# EAGLE board BB-v0.0.1-march-2011 (EAGLE 5.11)
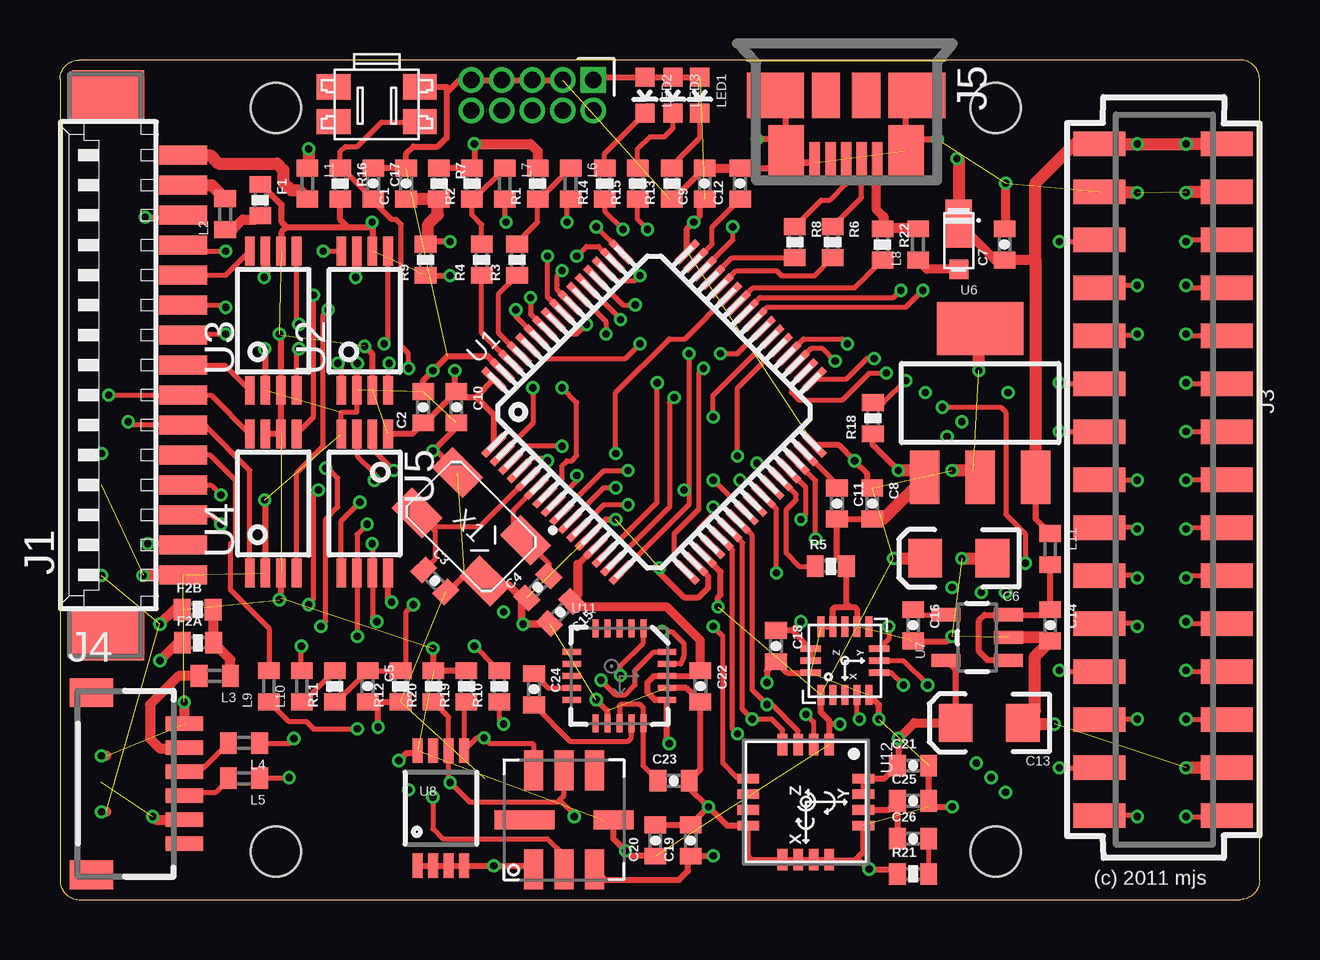
[diagram p0: board, top side]
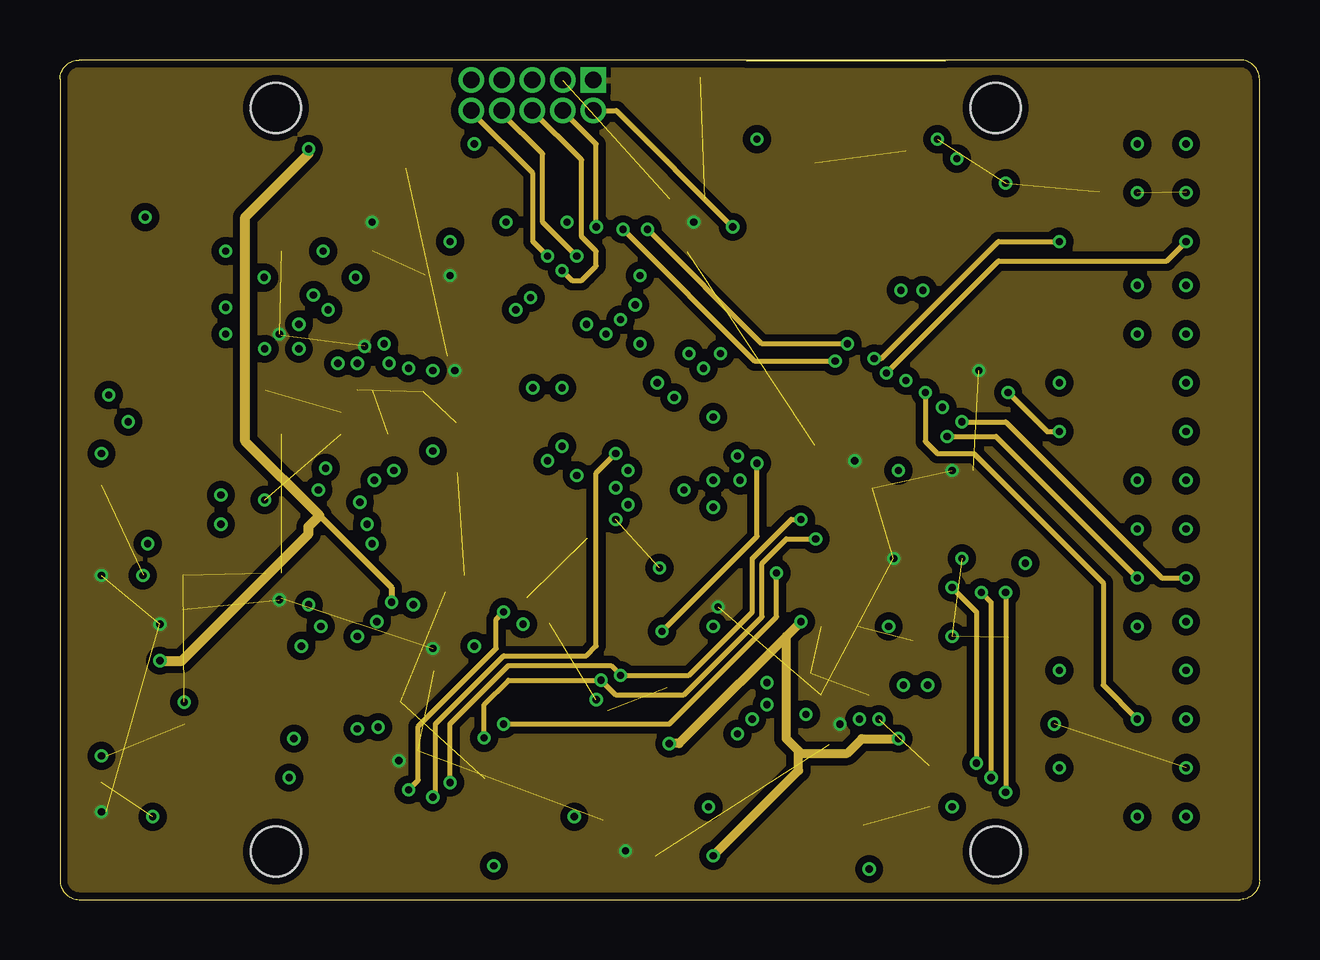
[diagram p1: board, inner layer Route2]
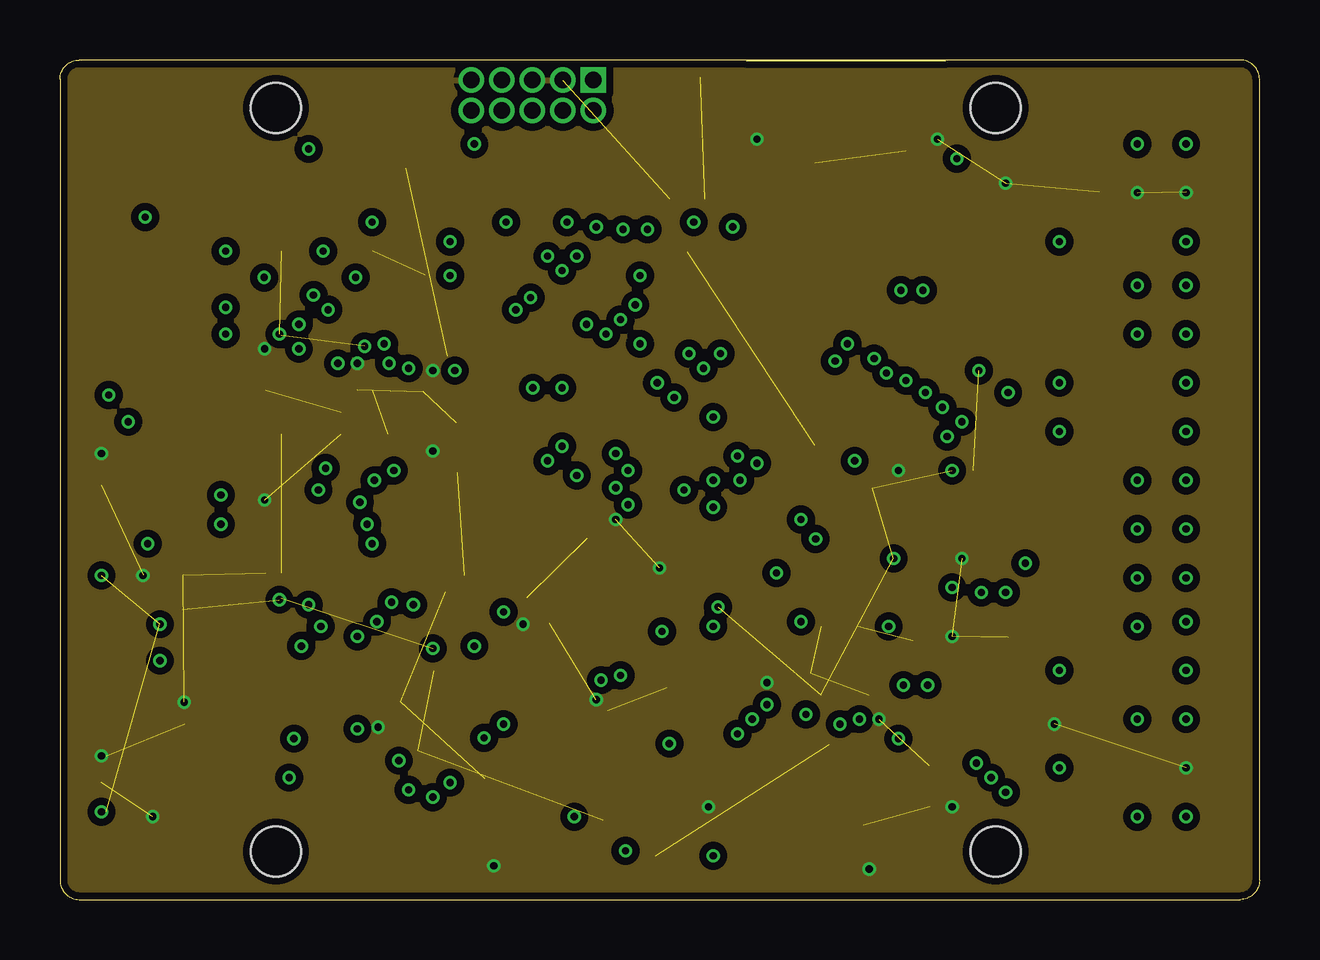
[diagram p2: board, inner layer Route15]
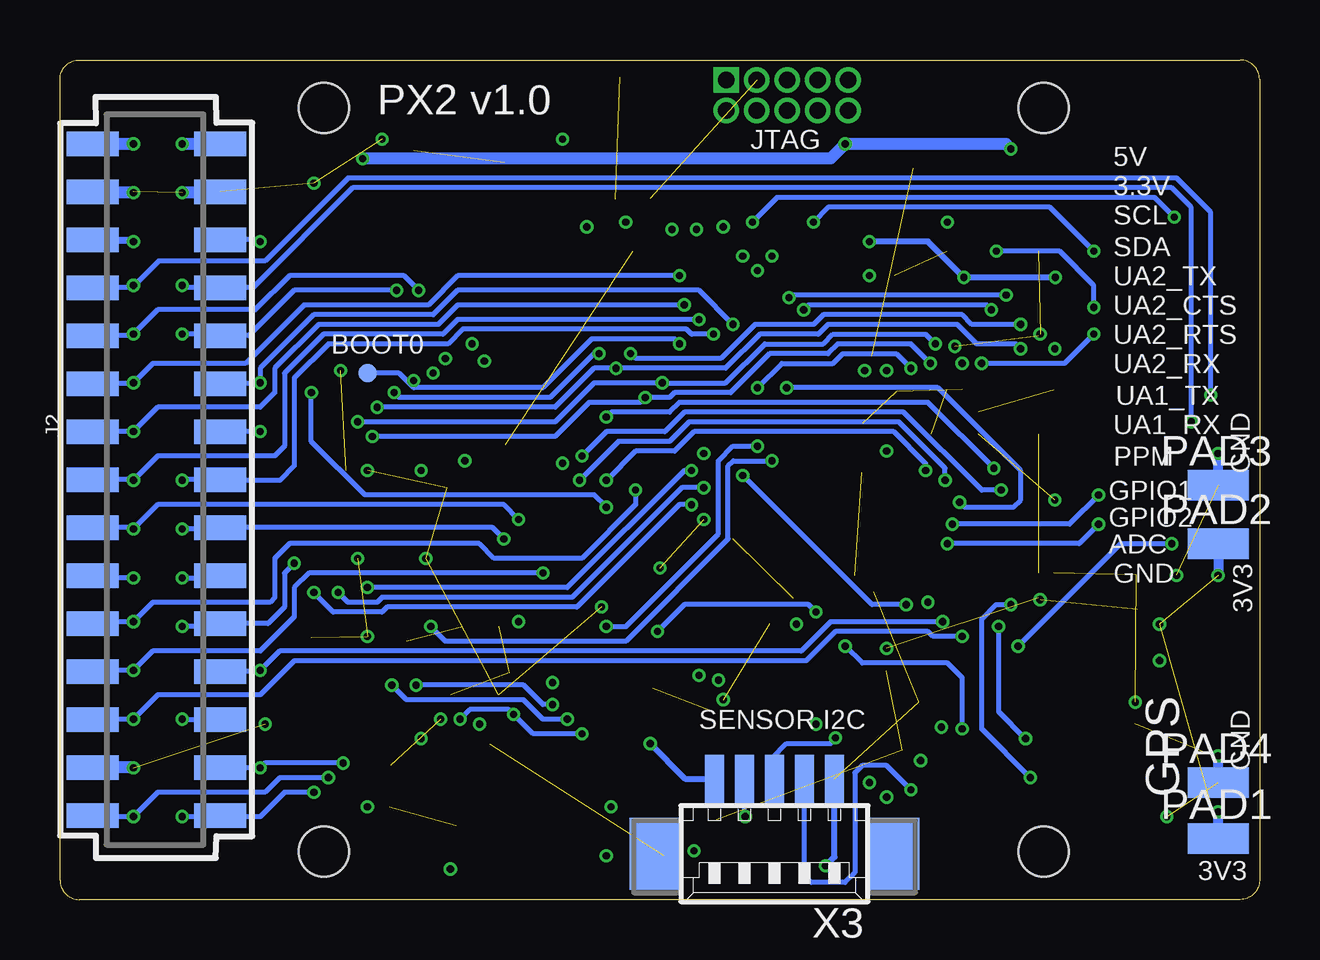
[diagram p3: board, bottom side, seen from below]

Size 50 x 35 mm. Coordinates in mm from the lower left corner, seen from the top.
Outline: 0,0.8 arc90 0.8,0 49.2,0 arc90 50,0.8 50,34.2 arc90 49.2,35 0.8,35 arc90 0,34.2 0,0.8
Copper layers (1*2*15*16): Top 0.035mm / dielectric 0.5mm / Route2 0.035mm / dielectric 0.5mm / Route15 0.035mm / dielectric 0.5mm / Bottom 0.035mm
Design rules "pixhawk2 *": minimum track width 0.15mm, minimum drill 0.2mm, track to track 0.15mm, track to pad 0.15mm, pad to pad 0.15mm, via to via 0.15mm, smd to smd 0.15mm, copper to edge 0.2mm, drill to drill 0.2mm, minimum pad ring 0.125mm, minimum via ring 0.125mm, stop-mask expansion 3mil, vias tented up to drill 0.3mm, thermal gap 8mil
Net classes: 0 signal: width 0.203 mm, drill 0.3 mm, clearance 0.203 mm; 1 power: width 0.254 mm, drill 0.3 mm, clearance 0.203 mm

## Footprints (pad centres in the part's own frame; a part is rotated, then mirrored left to right if it is on the bottom)
0402-CAP = smd 0.7 x 0.9: 1 -0.65,0; 2 0.65,0
EIA3216 = smd 1.4 x 1.6: A 1.4,0; C -1.4,0
MICROSMP = smd 0.8 x 0.8: ANODE 0.65,0 | smd 2 x 1.1: CATHODE -1.25,0
0402-PTC = smd 0.7 x 0.9: 1 -0.65,0; 2 0.65,0
53261-15 = smd 0.8 x 2: 1 8.75,-2.5; 2 7.5,-2.5; 3 6.25,-2.5; 4 5,-2.5; 5 3.75,-2.5; 6 2.5,-2.5; 7 1.25,-2.5; 8 0,-2.5; 9 -1.25,-2.5; 10 -2.5,-2.5; 11 -3.75,-2.5; 12 -5,-2.5; 13 -6.25,-2.5; 14 -7.5,-2.5; 15 -8.75,-2.5 | smd 2.1 x 3: S1 11.25,0.625; S2 -11.25,0.625
HEADER_2MM_2X15_REVERSE = smd 1.02 x 2.16: 1 -14,-2.655; 2 -14,2.655; 3 -12,-2.655; 4 -12,2.655; 5 -10,-2.655; 6 -10,2.655; 7 -8,-2.655; 8 -8,2.655; 9 -6,-2.655; 10 -6,2.655; 11 -4,-2.655; 12 -4,2.655; 13 -2,-2.655; 14 -2,2.655; 15 0,-2.655; 16 0,2.655; 17 2,-2.655; 18 2,2.655; 19 4,-2.655; 20 4,2.655; 21 6,-2.655; 22 6,2.655; 23 8,-2.655; 24 8,2.655; 25 10,-2.655; 26 10,2.655; 27 12,-2.655; 28 12,2.655; 29 14,-2.655; 30 14,2.655
HEADER_2MM_2X15 = smd 1.02 x 2.16: 1 14,-2.655; 2 14,2.655; 3 12,-2.655; 4 12,2.655; 5 10,-2.655; 6 10,2.655; 7 8,-2.655; 8 8,2.655; 9 6,-2.655; 10 6,2.655; 11 4,-2.655; 12 4,2.655; 13 2,-2.655; 14 2,2.655; 15 0,-2.655; 16 0,2.655; 17 -2,-2.655; 18 -2,2.655; 19 -4,-2.655; 20 -4,2.655; 21 -6,-2.655; 22 -6,2.655; 23 -8,-2.655; 24 -8,2.655; 25 -10,-2.655; 26 -10,2.655; 27 -12,-2.655; 28 -12,2.655; 29 -14,-2.655; 30 -14,2.655
SM06B-SRSS-TB = smd 0.6 x 1.55: 1 -2.5,2.975; 2 -1.5,2.975; 3 -0.5,2.975; 4 0.5,2.975; 5 1.5,2.975; 6 2.5,2.975 | smd 1.2 x 1.8: FIT@1 -3.8,-0.9; FIT@2 3.8,-0.9
MOLEX-47346-0001 = smd 1.7 x 0.44: 1 2.8,1.3; 2 2.8,0.65; 3 2.8,0; 4 2.8,-0.65; 5 2.8,-1.3 | smd 1.9 x 2.375: GND1 0,2.95; GND4 0,-2.95 | smd 2.1 x 1.475: GND2 2.3,2.5; GND3 2.3,-2.5 | smd 1.9 x 1.175: GND5 0,-0.838; GND6 0,0.838
FTSH-105-01-XXX-DV = drill 0.7 pad 1.067 square: 1 0,0 | drill 0.7 pad 1.067 round: 2 0,1.27; 3 1.27,0; 4 1.27,1.27; 5 2.54,0; 6 2.54,1.27; 7 3.81,0; 8 3.81,1.27; 9 5.08,0; 10 5.08,1.27
C0402 = smd 0.7 x 0.9: 1 -0.65,0; 2 0.65,0
LED-0603 = smd 0.8 x 0.8: A 0,-0.75; C 0,0.75
SMD1,27-2,54 = smd 1.27 x 2.54: 1 0,0
0402-RES = smd 0.7 x 0.9: 1 -0.65,0; 2 0.65,0
EVQP7J01K = smd 1.4 x 1.05: A1 -1.8,0.725; A2 1.8,0.725; B3 -1.8,-0.725; B4 1.8,-0.725
PAD.03X.03 = smd 0.762 x 0.762: P$1 0,0
TQFP64 = smd 1.2 x 0.29: 1 -5.7,3.75; 2 -5.7,3.25; 3 -5.7,2.75; 4 -5.7,2.25; 5 -5.7,1.75; 6 -5.7,1.25; 7 -5.7,0.75; 8 -5.7,0.25; 9 -5.7,-0.25; 10 -5.7,-0.75; 11 -5.7,-1.25; 12 -5.7,-1.75; 13 -5.7,-2.25; 14 -5.7,-2.75; 15 -5.7,-3.25; 16 -5.7,-3.75; 33 5.7,-3.75; 34 5.7,-3.25; 35 5.7,-2.75; 36 5.7,-2.25; 37 5.7,-1.75; 38 5.7,-1.25; 39 5.7,-0.75; 40 5.7,-0.25; 41 5.7,0.25; 42 5.7,0.75; 43 5.7,1.25; 44 5.7,1.75; 45 5.7,2.25; 46 5.7,2.75; 47 5.7,3.25; 48 5.7,3.75 | smd 0.29 x 1.2: 17 -3.75,-5.7; 18 -3.25,-5.7; 19 -2.75,-5.7; 20 -2.25,-5.7; 21 -1.75,-5.7; 22 -1.25,-5.7; 23 -0.75,-5.7; 24 -0.25,-5.7; 25 0.25,-5.7; 26 0.75,-5.7; 27 1.25,-5.7; 28 1.75,-5.7; 29 2.25,-5.7; 30 2.75,-5.7; 31 3.25,-5.7; 32 3.75,-5.7; 49 3.75,5.7; 50 3.25,5.7; 51 2.75,5.7; 52 2.25,5.7; 53 1.75,5.7; 54 1.25,5.7; 55 0.75,5.7; 56 0.25,5.7; 57 -0.25,5.7; 58 -0.75,5.7; 59 -1.25,5.7; 60 -1.75,5.7; 61 -2.25,5.7; 62 -2.75,5.7; 63 -3.25,5.7; 64 -3.75,5.7
R-PDSO-G08 = smd 0.4 x 1.2: 1 -0.975,-2.9; 2 -0.325,-2.9; 3 0.325,-2.9; 4 0.975,-2.9; 5 0.975,2.9; 6 0.325,2.9; 7 -0.325,2.9; 8 -0.975,2.9
SOT-223 = smd 1.219 x 2.235: 1 -2.311,-3.099; 2 0,-3.099; 3 2.311,-3.099 | smd 3.6 x 2.2: 4 0,3.099
SOT23-5 = smd 0.55 x 1.2: 1 -0.95,-1.3; 2 0,-1.3; 3 0.95,-1.3; 4 0.95,1.3; 5 -0.95,1.3
MSOP-8 = smd 0.41 x 1.02: 1 -0.975,-2.4; 2 -0.325,-2.4; 3 0.325,-2.4; 4 0.975,-2.4; 5 0.975,2.4; 6 0.325,2.4; 7 -0.325,2.4; 8 -0.975,2.4
LIS331DLH-MAN = smd 0.85 x 0.285: 1 -1.425,1; 2 -1.425,0.5; 3 -1.425,0; 4 -1.425,-0.5; 5 -1.425,-1; 9 1.425,-1; 10 1.425,-0.5; 11 1.425,0; 12 1.425,0.5; 13 1.425,1 | smd 0.285 x 0.85: 6 -0.5,-1.425; 7 0,-1.425; 8 0.5,-1.425; 14 0.5,1.425; 15 0,1.425; 16 -0.5,1.425
BMP085 = smd 1.67 x 0.8: 1 -2.065,1.27; 2 -2.065,0; 3 -2.065,-1.27; 5 2.065,-1.27; 6 2.065,0; 7 2.065,1.27 | smd 0.8 x 1.67: 4 0,-2.065 | smd 0.8 x 2.5: 8 0,1.65
LPCC20 = smd 0.25 x 0.76: 1 1,1.98; 2 0.5,1.98; 3 0,1.98; 4 -0.5,1.98; 5 -1,1.98; 11 -1,-1.98; 12 -0.5,-1.98; 13 0,-1.98; 14 0.5,-1.98; 15 1,-1.98 | smd 0.76 x 0.25: 6 -1.98,1; 7 -1.98,0.5; 8 -1.98,0; 9 -1.98,-0.5; 10 -1.98,-1; 16 1.98,-1; 17 1.98,-0.5; 18 1.98,0; 19 1.98,0.5; 20 1.98,1
L3G4200DH-MAN = smd 0.9 x 0.4: 1 -2.4,0.975; 2 -2.4,0.325; 3 -2.4,-0.325; 4 -2.4,-0.975; 9 2.4,-0.975; 10 2.4,-0.325; 11 2.4,0.325; 12 2.4,0.975 | smd 0.4 x 0.9: 5 -0.975,-2.4; 6 -0.325,-2.4; 7 0.325,-2.4; 8 0.975,-2.4; 13 0.975,2.4; 14 0.325,2.4; 15 -0.325,2.4; 16 -0.975,2.4
MOUNT-HOLE2.1 = hole 2.1: 0,0
OSCILLATOR-5.0X3.2 = smd 1.8 x 1.2: 1 -2,-1.2; 2 2,-1.2; 3 2,1.2; 4 -2,1.2
53261-05 = smd 0.8 x 2: 1 2.5,-2.5; 2 1.25,-2.5; 3 0,-2.5; 4 -1.25,-2.5; 5 -2.5,-2.5 | smd 2.1 x 3: S1 5,0.625; S2 -5,0.625

## Placement (x,y rotation side)
C1  0u1  [0402-CAP]  14.43,29.84 90 top
C2  0u1  [0402-CAP]  15.14,20.52 90 top
C3  10p  [0402-CAP]  15.62,13.29 315 top
C4  10p  [0402-CAP]  19.92,13.03 45 top
C5  0u1  [0402-CAP]  12.83,8.89 270 top
C6  10u  [EIA3216]  37.47,14.22 180 top
C7  0u1  [0402-CAP]  39.37,27.3 90 top
C8  0u1  [0402-CAP]  33.86,16.51 270 top
C9  0u1  [0402-CAP]  26.87,29.84 90 top
C10  0u1  [0402-CAP]  16.53,20.52 270 top
C11  2u2  [0402-CAP]  32.38,16.51 270 top
C12  2u2  [0402-CAP]  28.35,29.84 90 top
C13  10u  [EIA3216]  38.73,7.37 180 top
C14  0u1  [0402-CAP]  41.27,11.43 270 top
C15  0u1  [0402-CAP]  20.86,11.97 225 top
C16  470p  [0402-CAP]  35.56,11.43 270 top
C17  0u1  [0402-CAP]  13.06,29.84 270 top
C18  0u1  [0402-CAP]  29.84,10.57 270 top
C19  0u1  [0402-CAP]  26.29,2.46 90 top
C20  0u1  [0402-CAP]  24.82,2.46 90 top
C21  0u1  [0402-CAP]  35.56,5.59 0 top
C22  0u1  [0402-CAP]  26.7,8.89 270 top
C23  4u7  [0402-CAP]  25.58,4.95 0 top
C24  0u22  [0402-CAP]  19.76,8.76 270 top
C25  0u01  [0402-CAP]  35.56,4.11 0 top
C26  0u47  [0402-CAP]  35.56,2.54 0 top
D1  MSS1P4-M3  [MICROSMP]  37.47,26.92 270 top
F1  500mA  [0402-PTC]  8.35,29.16 270 top
F2A  150mA  [0402-PTC]  5.75,10.7 0 top
F2B  150mA  [0402-PTC]  5.74,12.09 0 top
J1  53261-15  [53261-15]  2.64,22.28 90 top
J2  HEADER_2X15-REV  [HEADER_2MM_2X15_REVERSE]  45.97,17.51 270 bottom
J3  HEADER_2X15  [HEADER_2MM_2X15]  45.97,17.51 90 top
J4  SM06B-SRSS-TB  [SM06B-SRSS-TB]  2.22,4.83 270 top
J5  47346-0001  [MOLEX-47346-0001]  32.77,33.53 270 top
J6  ARM_MINI_JTAG-TH  [FTSH-105-01-XXX-DV]  22.23,34.16 180 top
L1  FERRITE  [C0402]  10.31,29.84 270 top
L2  FERRITE  [C0402]  6.88,28.57 90 top
L3  FERRITE  [C0402]  6.45,9.32 180 top
L4  FERRITE  [C0402]  7.67,6.53 180 top
L5  FERRITE  [C0402]  7.67,5.05 180 top
L6  FERRITE  [C0402]  21.29,29.84 270 top
L7  FERRITE  [C0402]  18.54,29.84 270 top
L8  FERRITE  [C0402]  35.76,27.3 90 top
L9  FERRITE  [C0402]  8.71,8.89 90 top
L10  FERRITE  [C0402]  10.08,8.89 90 top
L11  FERRITE  [C0402]  41.27,14.61 270 top
LED1  GREEN  [LED-0603]  26.67,33.53 180 top
LED2  AMBER  [LED-0603]  24.38,33.53 180 top
LED3  BLUE  [LED-0603]  25.55,33.53 180 top
PAD1  [SMD1,27-2,54]  1.73,2.54 270 bottom
PAD2  [SMD1,27-2,54]  1.73,14.83 270 bottom
PAD3  [SMD1,27-2,54]  1.73,17.27 270 bottom
PAD4  [SMD1,27-2,54]  1.73,4.88 270 bottom
R1  4K7  [0402-RES]  19.91,29.84 90 top
R2  4K7  [0402-RES]  17.17,29.84 90 top
R3  100  [0402-RES]  19.05,26.67 90 top
R4  100  [0402-RES]  17.58,26.67 90 top
R5  10K  [0402-RES]  32.13,13.89 0 top
R6  22R  [0402-RES]  32.21,27.41 270 top
R7  0  [0402-RES]  15.8,29.84 270 top
R8  22R  [0402-RES]  30.63,27.41 270 top
R9  0  [0402-RES]  15.24,26.67 90 top
R10  1K0  [0402-RES]  18.31,8.89 90 top
R11  39K/1%  [0402-RES]  11.46,8.89 90 top
R12  10K/1%  [0402-RES]  14.2,8.89 90 top
R13  220R  [0402-RES]  25.5,29.84 90 top
R14  68  [0402-RES]  22.71,29.84 90 top
R15  220R  [0402-RES]  24.08,29.84 90 top
R16  10K  [0402-RES]  11.68,29.84 270 top
R18  10K  [0402-RES]  33.88,20.07 90 top
R19  4K7  [0402-RES]  16.94,8.89 90 top
R20  4K7  [0402-RES]  15.57,8.89 90 top
R21  10K  [0402-RES]  35.56,1.07 0 top
R22  10K  [0402-RES]  34.29,27.3 270 top
S1  RESET  [EVQP7J01K]  13.21,33.15 180 top
TP1  PAD.03  [PAD.03X.03]  37.19,21.95 0 bottom
U1  STM32F20X_TQFP64  [TQFP64]  24.77,20.32 45 top
U2  TXB0102  [R-PDSO-G08]  12.7,24.13 0 top
U3  TXB0102  [R-PDSO-G08]  8.89,24.13 0 top
U4  TXB0102  [R-PDSO-G08]  8.89,16.51 0 top
U5  SN74LVC2T45  [R-PDSO-G08]  12.7,16.51 180 top
U6  LD1117AS33  [SOT-223]  38.35,20.7 0 top
U7  MIC5207  [SOT23-5]  38.23,10.92 90 top
U8  128KB EEPROM  [MSOP-8]  15.88,3.81 0 top
U9  LIS331DLH  [LIS331DLH-MAN]  32.72,9.96 90 top
U10  BMP085  [BMP085]  21.01,3.33 90 top
U11  HMC5843SMD  [LPCC20]  23.32,9.32 0 top
U12  L3G4200DH  [L3G4200DH-MAN]  31.09,4.06 270 top
U$1  MOUNT-HOLE2.1MM  [MOUNT-HOLE2.1]  39,2 0 top
U$2  MOUNT-HOLE2.1MM  [MOUNT-HOLE2.1]  9,33 0 top
U$3  MOUNT-HOLE2.1MM  [MOUNT-HOLE2.1]  9,2 0 top
U$4  MOUNT-HOLE2.1MM  [MOUNT-HOLE2.1]  39,33 0 top
X1  8.000 KHz 5.0x3.2mm  [OSCILLATOR-5.0X3.2]  17.14,15.54 135 top
X3  [53261-05]  20.22,2.54 180 bottom

## Library data of the parts
C1 C2 C5 C7-C10 C14 C15 C17-C22 = pixhawk2; PARTNO: CC0402ZRY5V7BB104
C3 C4 = pixhawk2; PARTNO: CC0402JRNP09BN100
C6 C13 = pixhawk2; PARTNO: F931A106MAA
C11 C12 = pixhawk2; PARTNO: C1608Y5V1C225Z
C16 = pixhawk2; PARTNO: CC0402KRX7R9BB471
C23 = pixhawk2; PARTNO: C1608Y5V0J475Z
C24 = pixhawk2; PARTNO: C1005Y5V1C224Z
C25 = pixhawk2; PARTNO: CC0402KRX7R7BB103
C26 = pixhawk2; PARTNO: GRM155F51C474ZA01D
D1 = pixhawk2; PARTNO: MSS1P4-M3/89A
F1 = pixhawk2; PARTNO: MF-FSMF050X-2
F2A = pixhawk2; PARTNO: MF-FSMF020X-2
F2B = pixhawk2; DNP: T; PARTNO: MF-FSMF020X-2
J1 = pixhawk2; PARTNO: 53261-15
J2 = pixhawk2; BOM: EXCLUDE; PARTNO: 953230-2000-AR-PR
J3 = pixhawk2; PARTNO: 953230-2000-AR-PR
J4 = pixhawk2; PARTNO: SM06B-SRSS-TB
J5 = pixhawk2; PARTNO: 47346-0001
J6 = pixhawk2; PARTNO: M50-3900542
L1-L11 = pixhawk2; PARTNO: BKP1005HS121-T
LED1 = pixhawk2; PARTNO: LTST-C193KGKT-5A
LED2 = pixhawk2; PARTNO: LNJ437W84RA
LED3 = pixhawk2; PARTNO: LNJ937W8CRA
PAD1-PAD4 = wirepad; BOM: EXCLUDE
R1 R2 R19 R20 = pixhawk2; PARTNO: RMCF0402JT4K70
R3 R4 = pixhawk2; PARTNO: RMCF0402JT100R
R5 R12 R16 R18 R21 R22 = pixhawk2; PARTNO: RMCF0402FT10K0
R6 R8 = pixhawk2; PARTNO: RMCF0402JT22R0
R7 R9 = pixhawk2; PARTNO: RMCF0402ZT0R00
R10 = pixhawk2; PARTNO: RMCF0402JT1K00
R11 = pixhawk2; PARTNO: RC0402FR-0739K2L
R13 R15 = pixhawk2; PARTNO: RMCF0402JT220R
R14 = pixhawk2; PARTNO: ERJ-2GEJ680X
S1 = pixhawk2; PARTNO: EVQP7J01K
TP1 U$1-U$4 = pixhawk2; BOM: EXCLUDE; PARTNO: *
U1 = pixhawk2; PARTNO: STM32F205
U2-U4 = pixhawk2; PARTNO: TXB0102DCUR
U5 = pixhawk2; PARTNO: SN74LVC2T45
U6 = pixhawk2; PARTNO: LD1117AS33
U7 = pixhawk2; PARTNO: MIC5207-3.3YM5
U8 = pixhawk2; PARTNO: 24FC128-I/MS
U9 = pixhawk2; PARTNO: LIS331DLH
U10 = pixhawk2; PARTNO: BMP0805
U11 = pixhawk2; PARTNO: HMC5843
U12 = pixhawk2; PARTNO: L3G4200DH
X1 = pixhawk2; PARTNO: 7M-16.000MEEQ-T
X3 = pixhawk2

## Nets
!JTRST: J6.10 U1.56
ACCEL_CS: U1.4 U9.8
ADC123_IN10: C5.1 R11.1 R12.2 U1.8
ADC123_IN11: J2.28 J3.28 U1.9
ADC123_IN12: J2.29 J3.29 U1.10
ADC123_IN13: J2.30 J3.30 U1.11
BOOT0: R18.2 TP1.P$1 U1.60
CAN2_RX: J2.6 J3.6 U1.33
CAN2_TX: J2.5 J3.5 U1.34
GND [power]: C1.2 C2.2 C3.2 C4.1 C5.2 C6.C C7.2 C8.2 C9.2 C10.2 C11.2 C12.2 C13.C C14.2 C15.2 C16.2 C17.1 C18.2 C19.2 C20.2 C21.2 C22.2 C23.2 C25.2 J1.15 J2.3 J2.4 J2.27 J3.3 J3.4 J3.27 J4.1 J4.5 J5.5 J5.GND1 J5.GND2 J5.GND3 J5.GND4 J6.3 J6.5 J6.9 PAD3.1 PAD4.1 R5.2 R12.1 R13.1 R18.1 R21.1 S1.B3 U1.12 U1.18 U1.63 U2.2 U3.2 U4.2 U5.4 U6.1 U7.2 U8.1 U8.2 U8.3 U8.4 U9.5 U9.10 U9.12 U9.13 U9.16 U10.1 U11.12 U11.17 U12.8 U12.9 U12.10 U12.11 U12.12 U12.13 X1.2 X1.4 X3.5
GPIO1: U1.24 U5.2
GPIO2: U1.25 U5.3
GPIO_DIR: U1.2 U5.5
GPIO_EXT1: J1.13 J2.24 J3.24 U5.7
GPIO_EXT2: J1.12 J2.25 J3.25 U5.6
GYRO_CS: U1.3 U12.5
I2C1_SCL: R3.1 U1.61
I2C1_SCL_EXT: L6.1 R1.1 R3.2
I2C1_SDA: R4.1 U1.62
I2C2_SCL: J2.17 J3.17 R20.1 U1.29 U8.6 U10.6 U11.1 X3.2
I2C2_SDA: J2.18 J3.18 R19.1 U1.30 U8.5 U10.7 U11.20 X3.3
I2C2_SDA_EXT: L7.1 R2.1 R4.2
I2C3_SCL: J2.9 J3.9 U1.41
I2C3_SDA: J2.10 J3.10 U1.40
JTCK-SWCLK: J6.4 U1.49
JTDI: J6.8 U1.50
JTDO: J6.6 U1.55
JTMS-SWDIO: J6.2 U1.46
LED_AMBER: R14.1 U1.35
LED_BLUE: R15.1 U1.36
MAG_DRDY: U1.27 U11.19 X3.4
N$1: C4.2 U1.6 X1.1
N$2: C3.1 U1.5 X1.3
N$3: J1.2 L2.2
N$4: C11.1 U1.31
N$5: F2A.2 F2B.2 L3.1
N$6: C12.1 U1.47
N$7: J5.2 R6.1
N$8: J5.3 R8.1
N$9: C16.1 U7.4
N$11 [power]: C1.1 R7.2 R9.2 U2.7 U3.7
N$12: J1.6 U2.8
N$13: J1.7 U2.1
N$14 [power]: J1.1 L1.2
N$15: J1.5 U3.8
N$16: J1.8 U3.1
N$19: J1.3 L6.2
N$21: J4.3 L4.2
N$22: C17.2 R16.1 S1.A1 U1.7
N$23 [power]: D1.ANODE L8.1
N$24 [power]: J4.2 L3.2
N$25: J4.4 L5.2
N$26: J1.4 L7.2
N$27 [power]: F1.2 L2.1
N$28: LED3.C R15.2
N$29: LED1.C R13.2
N$30: LED2.C R14.2
N$31: L9.1 R10.2
N$32: J1.11 L9.2
N$33: C26.2 R21.2
N$34: C25.1 C26.1 U12.14
N$35: L10.1 R11.2
N$36: C23.1 U11.13 U11.15
N$37: J1.14 L10.2
N$39: C24.2 U11.14
N$40: C24.1 U11.9
N$100 [power]: C14.1 L11.2 U7.1 U7.3
OTG_FS_DM: R6.2 U1.44
OTG_FS_DP: R8.2 U1.45
PB2-BOOT1: R5.1 U1.28
PC8: J2.26 J3.26 U1.39
PPM_INPUT: J2.23 J3.23 R10.1 U1.26
PRES_DRDY: U1.43 U10.2
SPI1_MISO: U1.22 U9.7 U12.4
SPI1_MOSI: U1.23 U9.6 U12.3
SPI1_SCK: U1.21 U9.4 U12.2
SPI3_MISO: J2.13 J3.13 U1.52
SPI3_MOSI: J2.12 J3.12 U1.57
SPI3_NSS: J2.14 J3.14 U1.20
SPI3_SCK: J2.11 J3.11 U1.51
UART5_RX: J2.16 J3.16 U1.54
UART5_TX: J2.15 J3.15 U1.53
USART1_RX: U1.59 U4.4
USART1_RX_EXT: J1.10 J2.8 J3.8 U4.1
USART1_TX: U1.58 U4.5
USART1_TX_EXT: J1.9 J2.7 J3.7 U4.8
USART2_CTS: J2.19 J3.19 U1.14 U2.5
USART2_RTS: J2.20 J3.20 U1.15 U2.4
USART2_RX: J2.22 J3.22 U1.17 U3.4
USART2_TX: J2.21 J3.21 U1.16 U3.5
USART6_RX: L4.1 U1.38
USART6_TX: L5.1 U1.37
VBUS [power]: J5.1 L8.2 R22.1
VBUS_DETECT: R22.2 U1.42
VDD_3V3 [power]: C2.1 C6.A C8.1 C9.1 C10.1 C20.1 F1.1 F2B.1 J6.1 LED1.A LED2.A LED3.A PAD1.1 PAD2.1 R9.1 R16.2 R19.2 R20.2 U1.1 U1.19 U1.32 U1.48 U1.64 U2.3 U2.6 U3.3 U3.6 U4.3 U4.6 U4.7 U5.1 U6.2 U6.4 U8.8 U9.1 U10.4 U12.1
VDD_3V3_ANALOG [power]: C13.A C15.1 C18.1 C19.1 C21.1 C22.1 U1.13 U7.5 U9.14 U9.15 U10.3 U11.16 U11.18 U12.15 U12.16 X3.1
VDD_5V [power]: C7.1 D1.CATHODE F2A.1 J2.1 J2.2 J3.1 J3.2 L1.1 L11.1 R1.2 R2.2 R7.1 U5.8 U6.3

## Tracks (layer width: path | path; a pad name or v marks a point on that pad's centre or on a via)
!JTRST  (via drill 0.3)
  Top 0.203: U1.56 20.32,25.12 v20.32,26.82
  Route2 0.203: J6.10 17.14,32.84 19.71,30.28 19.71,27.43 v20.32,26.82
ACCEL_CS  (via drill 0.3)
  Top 0.203: U1.4 19.65,18.39 20.22,18.39 v20.32,18.29 | v34.54,11.38 34.54,10.86 U9.8
  Bottom 0.203: v20.32,18.29 21.95,18.29 22.15,18.09 22.15,15.04 26.42,10.77 33.93,10.77 v34.54,11.38
ADC123_IN10  (via drill 0.3)
  Top 0.203: v14.73,12.29 14.43,11.99 14.43,9.72 14.38,9.72 R12.2 C5.1 11.53,8.24 R11.1 | v21.54,17.68 21.54,17.45 U1.8
  Bottom 0.203: v14.73,12.29 16.15,12.29 v21.54,17.68
ADC123_IN11  (via drill 0.3, 0.3 pad 0.51)
  Top 0.203: v23.67,17.88 22.68,17.88 U1.9 | J2.28 43.3,5.49 v41.66,5.49
  Route2 0.203: v37.19,13.01 38.2,11.99 v38.2,5.69
  Bottom 0.203: v23.67,17.88 23.98,17.88 28.85,13.01 v37.19,13.01 | J2.28 43.3,5.49 v41.66,5.49 41.45,5.69 v38.2,5.69
ADC123_IN12  (via drill 0.3, 0.3 pad 0.51)
  Top 0.203: v23.16,17.17 22.68,17.17 U1.10 | J2.29 48.58,3.45 v46.94,3.45
  Route2 0.203: v38.41,12.8 38.81,12.39 v38.81,5.08
  Bottom 0.203: v23.16,17.17 24.08,17.17 28.65,12.6 36.58,12.6 36.78,12.39 38,12.39 v38.41,12.8 | J2.29 48.58,3.45 v46.94,3.45 45.92,4.47 41.45,4.47 40.84,5.08 v38.81,5.08
ADC123_IN13  (via drill 0.3, 0.3 pad 0.51)
  Top 0.203: v23.67,16.46 22.67,16.46 U1.11 | J2.30 44.85,3.51 v44.91,3.45
  Route2 0.203: v39.42,12.8 v39.42,4.47
  Bottom 0.203: v23.67,16.46 24.18,16.46 28.45,12.19 36.37,12.19 36.58,11.99 38.61,11.99 v39.42,12.8 | v39.42,4.47 40.64,4.47 41.66,3.45 43.27,3.45 J2.30 43.37,3.45 v44.91,3.45
BOOT0  (via drill 0.3)
  Top 0.203: U1.60 20.05,22.55 23.57,22.55 v24.18,23.16 | R18.2 34.33,20.72 v35.26,21.64
  Bottom 0.203: 35.41,21.49 35.26,21.34 29.87,21.34 27.84,23.37 24.38,23.37 v24.18,23.16 | 35.41,21.49 35.87,21.95 TP1.P$1 | 35.41,21.49 v35.26,21.64
CAN2_RX  (via drill 0.3)
  Top 0.203: U1.33 32.77,21.7 33.63,22.55 v33.93,22.55 | v41.66,27.43 43.24,27.43 J2.6
  Route2 0.203: v33.93,22.55 34.24,22.55 39.12,27.43 v41.66,27.43
  Bottom 0.203: J2.6 41.73,27.51 v41.66,27.43
CAN2_TX  (via drill 0.3)
  Top 0.203: U1.34 30.48,21.44 30.48,21.13 30.79,20.83 32.61,20.83 33.73,21.95 v34.44,21.95 | J2.5 47.02,27.51 v46.94,27.43
  Route2 0.203: v34.44,21.95 39.12,26.62 46.13,26.62 v46.94,27.43
  Bottom 0.203: v46.94,27.43 47.02,27.51 J2.5 48.55,27.43 v46.94,27.43
GND  (via drill 0.3)  (30 unrouted)
  Top 0.203: U2.2 12.38,20.32 11.72,20.32 U5.4
  Top 0.254: C14.2 41.13,10.92 | C17.1 C1.2 14.43,31.09 14.73,31.39 15.75,31.39 16.1,31.75 16.13,31.75 16.13,33.66 | C21.2 C25.2 36.26,4.06 36.26,3.86 v37.19,3.86 | R12.1 C5.2 13.26,8.24 v13.26,7.19 | U8.1 U8.2 U8.3 U8.4 v18.09,1.41 19.59,1.41 U10.1 | 16.13,33.66 16.13,33.87 S1.B3 | 16.13,33.66 16.64,34.16 J6.9 J6.5 J6.3 | U11.17 26.11,8.82 C22.2 26.7,5.42 C23.2 26.23,4.66 v27.03,3.86 | U9.13 U9.12 32.22,12.1 32.31,12.19 32.92,12.19 | 32.92,12.19 33.12,12.19 33.22,12.1 U9.10 | U12.8 27.8,3.09 v27.03,3.86 | U12.12 U12.11 U12.10 U12.9 28.82,1.66 28.65,1.83 28.65,3.05 | 32.1,1.63 33.12,1.63 33.22,1.73 | 33.22,1.73 33.49,1.99 U12.13 | v33.73,1.27 33.68,1.27 33.53,1.42 | 33.22,1.73 33.53,1.42 | 30.27,33.08 J5.GND3 29.53,30.5 C12.2 | 35.27,33.08 J5.GND2 35.74,31.7 v36.58,31.7 | 30.77,30.73 J5.5 30.43,30.73 30.28,30.89 30.28,31.7 v29.06,31.7 | C8.2 C11.2 32.38,14.29 R5.2 32.78,12.33 32.92,12.19 | U1.18 27.03,13.46 27.03,13.01 26.62,12.6 26.01,12.6 24.99,13.61 v24.99,13.82 | U9.16 30.3,9.46 C18.2 29.46,9.54 v29.46,9.04 | C20.2 C19.2 v27.03,3.86 | 40.64,7.87 C13.C 40.19,7.32 | v33.73,1.27 33.58,1.42 33.53,1.42 | U11.12 22.82,7.87 v22.35,8.33 | U4.2 8.56,16.63 v8.53,16.66 | U3.2 8.56,22.93 v8.53,22.96 | C2.2 15.14,21.64 v15.54,22.05 16.15,22.66 17.83,22.66 U1.63 | v12.39,22.35 12.39,21.25 U2.2 | v23.16,15.85 22.77,15.85 U1.12 | v37.19,10.97 36.98,10.77 C16.2 | 43.36,29.46 J2.4 | v46.94,29.46 46.94,29.51 | U6.1 35.76,17.88 | U9.5 34.14,8.11 v34.14,7.52 | v3.45,13.51 3.47,13.53 | C7.2 39.42,27.95 | 25.53,29.23 25.4,29.23 | C9.2 25.6,29.23 25.53,29.23 | v33.73,1.27 34.71,1.27 R21.1 | R13.1 25.53,29.23 | C3.2 16.18,12.83 16.87,13.51 17.48,13.51 X1.4 17.89,13.11 18.29,13.11
  Top 0.254: v46.94,5.49 46.96,5.51 | R18.1 33.88,18.95 v34.95,17.88 | X1.2 15.69,18.69 v15.54,18.69 16.53,19.68 C10.2
  Top 0.305: 19.23,12.57 C4.1 | 19.23,12.57 18.69,13.11 18.29,13.11 | 19.23,12.57 19.23,11.55 v19.3,11.48 20.37,11.48 C15.2
  Top 0.381: C16.2 35.7,10.92 | C9.2 C12.2 | U12.12 32.1,1.63 | U12.8 28.65,3.05 | 30.27,33.08 J5.GND4 | 35.27,33.08 J5.GND1 | J5.GND3 30.77,30.73 | 39.42,27.95 v39.42,29.87
  Top 0.406: 3.89,3.43 v3.86,3.45 3.99,3.33 J4.5 | J4.1 v5.19,8.22 v5.18,8.23 | v1.73,18.59 1.52,18.59 | v1.73,5.99 1.93,5.99
  Top 0.508: 41.13,10.92 U7.2 | C8.2 34.3,15.86 U6.1 | C14.2 40.64,10.14 40.64,7.87 | 40.19,7.32 v41.45,7.32 | v44.91,29.46 43.36,29.46 | 46.94,29.51 J2.3 | v37.59,14.22 C6.C | 35.76,17.88 v34.95,17.88 | 3.47,13.53 J1.15 | 46.96,5.51 J2.27
  Bottom 0.254: 48.59,29.46 J2.3 | J2.4 43.36,29.46 | v46.94,5.49 46.96,5.51 | X3.5 17.72,1.78 v18.09,1.41
  Bottom 0.406: PAD3.1 v1.73,18.59 | PAD4.1 v1.73,5.99
  Bottom 0.508: v46.94,29.46 48.59,29.46 | 43.36,29.46 v44.91,29.46 | 46.96,5.51 J2.27
  pour Route15 (isolate 0.305): 0.2,34.75 0.2,0.2 49.78,0.2 49.78,34.75
GPIO1  (via drill 0.3)
  Top 0.203: U5.2 12.95,19.34 | U1.24 27.23,17.5 v27.23,17.48 | U5.2 13.01,19.39 | v13.92,17.88 13.03,18.78 U5.2
  Bottom 0.203: v13.92,17.88 13.92,18.19 15.24,19.51 23.57,19.51 24.38,18.69 26.01,18.69 v27.23,17.48
GPIO2  (via drill 0.3)
  Top 0.203: U1.25 28.35,17.09 v28.35,17.48 | v13.11,17.48 13.11,17.78 12.39,18.49 12.39,19.39 U5.3
  Bottom 0.203: v13.11,17.48 13.11,17.98 15.04,19.91 23.77,19.91 24.59,19.1 26.72,19.1 v28.35,17.48
GPIO_DIR  (via drill 0.3)
  Top 0.203: U1.2 19.71,19.86 v19.71,21.34 | v12.5,16.56 11.72,15.79 U5.5
  Bottom 0.203: v19.71,21.34 13.41,21.34 9.96,17.88 9.96,16.66 10.26,16.36 12.29,16.36 v12.5,16.56
GPIO_EXT1  (via drill 0.3, 0.3 pad 0.51)
  Top 0.203: v41.66,9.55 41.7,9.51 J2.24 | J1.13 6.33,16.03 v6.71,15.65 | v13.01,14.83 13.03,14.81 U5.7 13.03,11.77 v13.21,11.58
  Bottom 0.203: v13.01,14.83 7.52,14.83 v6.71,15.65 | v13.21,11.58 17.88,11.58 19.1,10.36 40.84,10.36 v41.66,9.55 41.7,9.51 J2.24
GPIO_EXT2  (via drill 0.3, 0.3 pad 0.51)
  Top 0.203: v12.8,15.65 12.38,15.22 U5.6 12.38,10.99 v12.39,10.97 | v46.94,7.52 46.95,7.51 J2.25 | J1.12 6.29,17.28 v6.71,16.87
  Bottom 0.203: v6.71,16.87 7.92,15.65 v12.8,15.65 | J2.25 48.62,7.52 v46.94,7.52 45.92,8.53 41.66,8.53 40.23,9.96 18.9,9.96 17.68,11.18 13.82,11.18 13.61,10.97 v12.39,10.97
GYRO_CS  (via drill 0.3)
  Top 0.203: U1.3 19.45,18.9 v20.93,18.9 | v27.23,11.38 27.64,10.97 27.64,5.69 28.29,5.04 U12.5
  Bottom 0.203: v20.93,18.9 21.95,18.9 22.55,18.29 22.55,15.24 26.42,11.38 v27.23,11.38
I2C1_SCL
  Top 0.203: U1.61 18.29,23.61 18.29,25.26 R3.1
I2C1_SCL_EXT
  Top 0.203: R3.2 19.05,27.38 19.91,28.25 R1.1 19.98,29.2 L6.1
I2C1_SDA
  Top 0.203: U1.62 17.58,23.62 R4.1
I2C2_SCL  (via drill 0.3)
  Top 0.203: R20.1 16.2,7.61 U8.6 16.2,4.93 v16.26,4.88 17.07,4.06 20.73,4.06 20.83,4.17 | v30.89,15.85 31.09,16.05 31.09,17.18 U1.29 | U11.1 24.32,10.7 23.37,9.75 v23.37,9.35 | J2.17 47,15.51 v46.94,15.44 | 20.83,4.17 21.01,4.34 U10.6 | v21.44,3.45 21.44,3.56 20.83,4.17
  Route2 0.203: v30.89,15.85 30.48,15.85 28.85,14.22 28.85,11.99 26.21,9.35 v23.37,9.35 22.96,9.75 18.69,9.75 16.26,7.32 v16.26,4.88
  Bottom 0.203: v30.89,15.85 31.5,16.46 45.92,16.46 v46.94,15.44 47,15.51 J2.17 | 21.45,3.47 v21.44,3.45 21.47,3.48 X3.2
I2C2_SDA  (via drill 0.3, 0.3 pad 0.51)
  Top 0.203: U1.30 31.5,17.48 v31.5,15.04 | U11.20 24.75,10.32 23.98,9.55 23.98,8.94 23.57,8.53 23.16,8.53 v22.55,9.14 | v44.91,15.44 44.84,15.51 J2.18 | R19.1 16.94,8.1 16.87,8.03 16.87,6.23 U8.5 17.37,6.73 v17.68,6.73 17.91,6.5 19.71,6.5 19.74,6.48 U10.7
  Route2 0.203: v31.5,15.04 30.28,15.04 29.26,14.02 29.26,11.79 26.01,8.53 23.16,8.53 v22.55,9.14 18.69,9.14 17.68,8.13 v17.68,6.73
  Bottom 0.203: v31.5,15.04 31.97,15.51 J2.18 43.38,15.44 v44.91,15.44 | v17.68,6.73 17.68,6.71 17.88,6.5 19.71,6.5 20.32,5.89 20.32,5.14 X3.3
I2C2_SDA_EXT
  Top 0.203: L7.1 17.24,29.2 R2.1 17.17,28.55 17.58,28.14 R4.2
I2C3_SCL  (via drill 0.3)
  Top 0.203: U1.41 29.19,25.09 34.75,25.09 v35.05,25.4 | v46.94,23.57 47,23.51 J2.9
  Bottom 0.203: v35.05,25.4 35.66,26.01 40.44,26.01 41.86,24.59 45.92,24.59 v46.94,23.57 47,23.51 J2.9
I2C3_SDA  (via drill 0.3, 0.3 pad 0.51)
  Top 0.203: v44.91,23.57 44.84,23.51 J2.10 | U1.40 29.49,24.69 35.26,24.69 v35.97,25.4
  Bottom 0.203: v35.97,25.4 40.23,25.4 42.13,23.51 J2.10 43.38,23.57 v44.91,23.57
JTCK-SWCLK  (via drill 0.3)
  Top 0.203: v22.35,28.04 U1.49
  Route2 0.203: J6.4 22.35,31.5 v22.35,28.04
JTDI  (via drill 0.3)
  Top 0.203: v21.54,26.82 21.95,27.23 22.45,27.23 U1.50
  Route2 0.203: J6.8 18.41,32.79 20.12,31.09 20.12,28.25 v21.54,26.82
JTDO  (via drill 0.3)
  Top 0.203: U1.55 20.73,25.42 20.73,25.6 20.73,26.01 v20.93,26.21
  Route2 0.203: v20.93,26.21 21.34,25.81 21.74,25.81 21.95,26.01 22.35,26.42 22.35,27.03 21.74,27.64 21.74,30.84 J6.6
JTMS-SWDIO  (via drill 0.3)
  Top 0.203: U1.46 28.04,27.49 v28.04,28.04
  Route2 0.203: v28.04,28.04 23.19,32.89 J6.2
LED_AMBER  (via drill 0.3)
  Top 0.203: U1.35 31.3,22.96 31.8,22.96 v32.31,22.45 | v23.47,27.94 22.71,28.7 R14.1
  Route2 0.203: v32.31,22.45 28.96,22.45 v23.47,27.94
LED_BLUE  (via drill 0.3)
  Top 0.203: U1.36 31,23.37 32.61,23.37 v32.82,23.16 | v24.49,27.94 24.08,28.35 R15.1
  Route2 0.203: v32.82,23.16 29.26,23.16 v24.49,27.94
MAG_DRDY  (via drill 0.3)
  Top 0.203: U11.19 25.88,9.82 26.01,10.16 26.01,10.67 25.5,11.18 v25.09,11.18 | v29.06,18.19 29.06,17.8 U1.27
  Route2 0.203: v25.09,11.18 29.06,15.14 v29.06,18.19 | v14.53,4.57 14.94,4.98 14.94,7.21 18.19,10.46 18.19,11.68 v18.49,11.99
  Bottom 0.203: X3.4 18.97,0.98 18.69,0.71 17.27,0.71 16.87,1.12 16.87,5.28 16.56,5.59 15.54,5.59 v14.53,4.57 | v18.49,11.99 18.8,12.29 23.98,12.29 24.28,11.99 v25.09,11.18
N$1
  Top 0.203: C4.2 20.38,14.01 X1.1 19.41,15.04 18.9,15.54 18.9,16.22 U1.6
N$2
  Top 0.203: C3.1 15.65,14.23 15.65,15.35 X1.3 15.45,15.54 17.52,15.54 U1.5
N$3
  Top 0.508: L2.2 6.33,29.78 J1.2
N$4
  Top 0.203: U1.31 32.38,17.3 C11.1
N$5
  Top 0.406: L3.1 7.1,10 F2A.2 F2B.2
N$6
  Top 0.203: U1.47 27.18,27.33 27.18,28.03 C12.1
N$7
  Top 0.203: R6.1 33.42,29.27 J5.2
N$8
  Top 0.203: R8.1 31.73,29.16 32.11,29.16 32.77,29.82 J5.3
N$9
  Top 0.203: U7.4 35.77,11.87 C16.1
N$11  (via drill 0.3)
  Top 0.254: R9.2 15.35,27.43 v16.26,27.43 | 8.56,25.99 v8.51,25.93
  Top 0.381: R9.2 15.35,27.32 | v12.32,25.93 12.38,25.99 U2.7 | U3.7 8.56,25.99
  Top 0.508: C1.1 R7.2 15.75,29.14 15.75,28.55 15.35,28.15 15.35,27.43
  Bottom 0.254: v8.51,25.93 v12.32,25.93 13.82,27.43 v16.26,27.43
N$12  (via drill 0.3)
  Top 0.203: v6.91,24.69 6.82,24.78 J1.6 | U2.8 v10.98,27.03 v10.97,27.03
  Bottom 0.203: v10.97,27.03 8.33,27.03 6.91,25.6 v6.91,24.69
N$13  (via drill 0.3)
  Top 0.203: U2.1 11.72,22.21 v11.58,22.35 | v6.91,23.57 5.19,23.57 J1.7
  Bottom 0.203: v11.58,22.35 8.13,22.35 v6.91,23.57
N$14
  Top 0.508: J1.1 6.26,31.03 6.6,30.68 9.04,30.68 9.31,30.41 9.31,29.91 9.65,29.57 9.94,29.57 L1.2
N$15
  Top 0.203: U3.8 6.91,26.03 J1.5
N$16
  Top 0.203: U3.1 6.87,22.28 J1.8
N$19  (via drill 0.3)
  Top 0.203: v21.13,28.25 21.13,29.04 L6.2 | v3.56,28.45 5.06,28.45 J1.3
  Bottom 0.203: v21.13,28.25 20.12,29.26 4.37,29.26 v3.56,28.45
N$21
  Top 0.203: L4.2 7.02,6.51 5.99,5.49 5.35,5.49 J4.3
N$22  (via drill 0.3)
  Top 0.203: U1.7 20.93,17.55 20.93,18.09 21.13,18.29 21.34,18.29 21.54,18.49 21.54,20.73 v20.93,21.34 | v14.53,22.15 14.53,22.76 14.22,23.06 14.22,28.14 14.02,28.35 13.82,28.35 13.06,29.11 C17.2 11.76,30.5 R16.1 11.68,31.19 11.89,31.39 12.39,31.39 13.41,32.41 15,32.41 S1.A1
  Bottom 0.203: v20.93,21.34 19.91,22.35 17.78,22.35 17.37,22.76 15.14,22.76 v14.53,22.15
N$23
  Top 0.381: L8.1 36.14,26.27 D1.ANODE
N$24
  Top 0.406: L3.2 4.95,9.32 3.76,8.13 3.76,6.71 4.17,6.3 5.16,6.3 J4.2
N$25
  Top 0.203: L5.2 7.02,4.99 6.5,4.47 5.34,4.47 J4.4
N$26  (via drill 0.3)
  Top 0.203: L7.2 18.54,28.3 v18.59,28.25 | 6.85,26.97 v6.91,27.03 5.99,27.03 5.74,27.28 J1.4
  Bottom 0.203: v18.59,28.25 17.98,28.85 8.74,28.85 v6.91,27.03
N$27
  Top 0.406: F1.2 8.19,28.35 7.62,28.35 7.2,27.93 L2.1
N$28
  Top 0.203: LED3.C 25.55,32.16 25.2,31.8 24.59,31.8 24.08,31.29 R15.2
N$29
  Top 0.203: LED1.C 26.67,31.77 25.5,30.6 R13.2
N$30
  Top 0.203: R14.2 22.71,31.1 LED2.C
N$31  (via drill 0.3)
  Top 0.203: v17.27,10.57 18.11,9.73 18.12,9.73 R10.2 | 8.74,8.21 L9.1 9.54,7.42 10.26,7.42 10.57,7.11 v12.39,7.11
  Bottom 0.203: v17.27,10.57 16.56,9.86 13.01,9.86 12.39,9.25 v12.39,7.11
N$32
  Top 0.203: J1.11 6.26,18.53 7.32,17.48 7.32,15.04 7.11,14.83 7.11,12.9 8.74,11.28 8.74,9.56 L9.2
N$33
  Top 0.203: R21.2 C26.2
N$34
  Top 0.254: U12.14 34.53,3.74 C25.1 C26.1
N$35
  Top 0.203: L10.1 10.15,8.24 R11.2
N$36
  Top 0.203: C23.1 24.32,5.56 U11.15 24.32,7.99 24.18,8.13 23.37,8.13 23.32,8.08 U11.13
N$37  (via drill 0.3)
  Top 0.203: v10.06,10.57 10.06,9.56 L10.2 | v3.66,14.83 5.14,14.83 J1.14
  Bottom 0.203: v3.66,14.83 5.79,14.83 v10.06,10.57
N$39
  Top 0.203: U11.14 23.82,6.75 23.67,6.6 21.27,6.6 C24.2
N$40
  Top 0.203: C24.1 20.35,8.82 U11.9
N$100
  Top 0.254: L11.2 C14.1 41.07,11.87 U7.3 38.54,11.87 38.3,11.63 38.3,10.34 38.67,9.97 U7.1
OTG_FS_DM
  Top 0.203: R6.2 31.46,26.01 30.07,26.01 29.87,26.21 28.18,26.21 U1.44
OTG_FS_DP
  Top 0.203: R8.2 28.02,26.76 U1.45
PB2-BOOT1
  Top 0.203: U1.28 30.68,16.88 30.68,16.66 30.28,16.26 30.28,14.43 30.81,13.89 R5.1
PC8  (via drill 0.3)
  Top 0.203: U1.39 29.31,23.82 28.25,22.76 v27.53,22.76 | v44.91,7.52 J2.26
  Route2 0.203: v44.91,7.52 43.48,8.94 43.48,13.21 38.1,18.59 36.58,18.59 36.07,19.1 v36.07,21.13
  Bottom 0.203: J2.26 44.9,7.51 v44.91,7.52 | v27.53,22.76 27.74,22.76 29.57,20.93 35.87,20.93 v36.07,21.13
PPM_INPUT  (via drill 0.3)
  Top 0.203: U1.26 29.87,16.27 v29.87,13.61 | v46.94,9.55 46.98,9.51 J2.23 | R10.1 18.31,7.49 v18.49,7.32
  Route2 0.203: v18.49,7.32 25.4,7.32 29.87,11.79 v29.87,13.61
  Bottom 0.203: v29.87,13.61 39.62,13.61 40.23,13.01 40.23,11.79 41.66,10.36 46.13,10.36 v46.94,9.55 48.59,9.55 J2.23
PRES_DRDY  (via drill 0.3)
  Top 0.203: U1.43 26.05,23.37 25.4,23.37 23.16,21.13 v23.16,18.59 | v15.54,4.27 15.54,2.95 15.95,2.54 20.32,2.54 21.01,1.85 U10.2
  Route2 0.203: v23.16,18.59 22.35,17.78 22.35,10.57 21.95,10.16 18.49,10.16 15.65,7.32 15.65,4.37 v15.54,4.27
SPI1_MISO  (via drill 0.3)
  Top 0.203: U1.22 28.45,14.87 28.45,7.92 v28.85,7.52 29.67,7.52 30.11,7.07 U12.4 30.07,6.5 | U9.7 35.15,9.96 v36.17,8.94
  Bottom 0.203: v36.17,8.94 35.56,8.33 30.68,8.33 29.87,7.52 v28.85,7.52
SPI1_MOSI  (via drill 0.3)
  Top 0.203: U1.23 28.85,15.17 28.85,8.74 v29.46,8.13 29.67,8.13 30.77,7.03 U12.3 | U9.6 34.64,9.46 v35.15,8.94
  Bottom 0.203: v35.15,8.94 30.68,8.94 29.87,8.13 v29.46,8.13
SPI1_SCK  (via drill 0.3)
  Top 0.203: U1.21 28.04,14.57 28.04,7.11 v28.25,6.91 | U12.2 31.41,7.4 v31.09,7.72 | v33.33,7.52 33.22,7.63 U9.4
  Bottom 0.203: v28.25,6.91 30.28,6.91 v31.09,7.72 31.29,7.92 32.92,7.92 v33.33,7.52
SPI3_MISO  (via drill 0.3)
  Top 0.203: J2.13 v46.94,19.51 | v23.98,24.79 23.48,24.79 U1.52
  Bottom 0.203: v23.98,24.79 33.43,24.79 34.24,23.98 39.22,23.98 41.05,22.15 41.05,21.13 41.66,20.52 45.92,20.52 v46.94,19.51 J2.13
SPI3_MOSI  (via drill 0.3)
  Top 0.203: 20.56,24.15 U1.57 21.16,23.57 21.54,23.57 v21.95,23.98 | v41.66,21.54 41.69,21.51 J2.12
  Bottom 0.203: v21.95,23.98 23.37,25.4 33.43,25.4 34.44,24.38 39.42,24.38 41.66,22.15 v41.66,21.54 41.69,21.51 J2.12
SPI3_NSS  (via drill 0.3)
  Top 0.203: U1.20 26.62,15.28 26.62,15.44 27.23,16.05 v27.23,16.36 | v41.66,19.51 J2.14
  Route2 0.203: v39.52,21.13 41.15,19.51 v41.66,19.51
  Bottom 0.203: v27.23,16.36 27.74,16.87 37.29,16.87 39.52,19.1 v39.52,21.13 | J2.14 v41.66,19.51
SPI3_SCK  (via drill 0.3)
  Top 0.203: U1.51 23.17,25.81 23.98,25.81 v24.18,26.01 | v46.94,21.54 46.97,21.51 J2.11
  Bottom 0.203: v24.18,26.01 33.43,26.01 34.65,24.79 39.83,24.79 42.27,22.35 46.13,22.35 v46.94,21.54 46.97,21.51 J2.11
UART5_RX  (via drill 0.3, 0.3 pad 0.51)
  Top 0.203: v44.91,17.48 43.35,17.48 J2.16 | v22.76,23.57 22.76,24.09 U1.54
  Bottom 0.203: v22.76,23.57 23.67,23.57 23.88,23.77 33.22,23.77 33.83,23.16 38.81,23.16 40.23,21.74 40.23,18.09 40.84,17.48 43.29,17.48 J2.16 44.87,17.51 v44.91,17.48
UART5_TX  (via drill 0.3)
  Top 0.203: J2.15 46.97,17.51 v46.94,17.48 | v23.37,24.18 23.37,24.19 U1.53
  Bottom 0.203: v23.37,24.18 33.43,24.18 34.04,23.57 39.01,23.57 40.64,21.95 40.64,18.9 41.05,18.49 45.92,18.49 v46.94,17.48 46.97,17.51 J2.15
USART1_RX  (via drill 0.3)
  Top 0.203: U4.4 9.87,17.79 10.97,18.9 10.97,24.38 v11.18,24.59 | v19,24.59 19,24.32 U1.59
  Bottom 0.203: v19,24.59 18.8,24.79 11.38,24.79 v11.18,24.59
USART1_RX_EXT  (via drill 0.3)
  Top 0.203: U4.1 7.92,17.89 6.03,19.78 J1.10 2.98,19.78 v2.85,19.91 | J2.8 43.41,25.6 v44.91,25.6
  Bottom 0.203: 41.95,25.51 37.8,29.67 3.66,29.67 2.85,28.85 v2.85,19.91 | 41.95,25.51 41.96,25.5 | 41.95,25.51 J2.8 44.81,25.51 v44.91,25.6
USART1_TX  (via drill 0.3)
  Top 0.203: U4.5 10.57,20.11 v10.57,25.2 | v19.61,25.09 19.61,24.41 U1.58
  Bottom 0.203: v10.57,25.2 19.51,25.2 v19.61,25.09
USART1_TX_EXT  (via drill 0.3)
  Top 0.203: U4.8 6.3,21.03 J1.9 v2.04,21.03 v2.03,21.03 | J2.7 47.03,25.51 v46.94,25.6
  Bottom 0.203: v2.03,21.03 2.03,28.65 3.45,30.07 38,30.07 41.45,26.62 45.89,26.62 46.91,25.6 v46.94,25.6 47.03,25.51 J2.7
USART2_CTS  (via drill 0.3, 0.3 pad 0.51)
  Top 0.203: U1.14 24.89,16.56 v24.89,21.54 | v13.51,23.16 13.68,23.33 U2.5 | J2.19 47.04,13.51 v46.94,13.41
  Route2 0.203: v37.59,19.91 39.42,19.91 45.92,13.41 v46.94,13.41
  Bottom 0.203: v13.51,23.16 13.92,23.57 17.78,23.57 18.19,23.16 20.62,23.16 22.25,21.54 v24.89,21.54 27.74,21.54 29.36,19.91 v37.59,19.91 | v46.94,13.41 48.53,13.41 J2.19
USART2_RTS  (via drill 0.3, 0.3 pad 0.51)
  Top 0.203: U2.4 13.68,22.31 v13.72,22.35 | v25.6,20.93 25.4,20.73 25.4,16.36 U1.15 | J2.20 44.81,13.51 v44.91,13.41
  Route2 0.203: v36.98,19.3 39.01,19.3 v44.91,13.41
  Bottom 0.203: v13.72,22.35 14.53,23.16 17.58,23.16 17.98,22.76 20.42,22.76 22.05,21.13 24.38,21.13 24.59,20.93 v25.6,20.93 25.81,20.73 27.94,20.73 29.36,19.3 v36.98,19.3 | v44.91,13.41 43.42,13.41 J2.20
USART2_RX  (via drill 0.3, 0.3 pad 0.51)
  Top 0.203: U3.4 9.87,22.87 v9.96,22.96 | v26.82,22.15 26.62,21.95 26.62,16.26 25.6,15.24 25.6,14.18 U1.17 | v36.78,20.52 39.22,20.52 39.42,20.32 39.42,16.05 40.23,15.24 v40.23,14.02 | v44.91,11.38 44.78,11.51 J2.22
  Bottom 0.203: v9.96,22.96 10.16,23.16 11.79,23.16 12.6,23.98 17.98,23.98 18.39,23.57 20.83,23.57 22.25,22.15 v26.82,22.15 27.74,22.15 29.36,20.52 v36.78,20.52 | v40.23,14.02 40.64,13.61 40.64,12.19 41.32,11.51 J2.22 43.45,11.38 v44.91,11.38
USART2_TX  (via drill 0.3)
  Top 0.203: v26.21,22.76 26.21,17.07 | U1.16 26.21,16.46 26.21,17.07 | U3.5 9.87,24.07 v9.96,23.98 | J2.21 47.01,11.51 v46.94,11.58 | 26.21,17.07 v26.01,17.07
  Bottom 0.203: v9.96,23.98 11.99,23.98 12.39,24.38 18.19,24.38 18.59,23.98 21.03,23.98 22.45,22.55 26.01,22.55 v26.21,22.76 | J2.21 48.55,11.58 v46.94,11.58 46.13,12.39 41.25,12.39 41.05,12.6 41.05,14.22 40.44,14.83 32.51,14.83 31.9,14.22 28.25,14.22 26.01,16.46 v26.01,17.07
USART6_RX  (via drill 0.3)
  Top 0.203: v27.23,20.12 27.23,21.02 U1.38 | v11.07,17.98 11.18,17.98 11.58,17.58 11.58,16.36 11.07,15.85 11.07,11.58 v10.87,11.38 | v9.75,6.71 9.55,6.5 8.35,6.5 L4.1
  Bottom 0.203: v11.07,17.98 13.82,20.73 24.18,20.73 24.59,20.32 27.03,20.32 v27.23,20.12 | v10.87,11.38 10.87,7.82 v9.75,6.71
USART6_TX  (via drill 0.3)
  Top 0.203: U1.37 28.25,21.32 v28.25,18.49 | v10.77,17.07 10.57,16.87 10.57,12.5 v10.36,12.29 | v9.55,5.08 8.35,5.08 L5.1
  Bottom 0.203: v10.77,17.07 11.58,17.07 14.83,20.32 23.98,20.32 24.79,19.51 27.23,19.51 v28.25,18.49 | v10.36,12.29 10.97,12.29 11.58,11.68 11.58,7.11 v9.55,5.08
VBUS
  Top 0.381: J5.1 34.04,30.7 34.04,28.75 34.34,28.45
  Top 0.406: 34.34,28.01 34.34,28.45 | R22.1 34.34,28.01 | 34.34,28.01 35.71,28.01 L8.2
VBUS_DETECT
  Top 0.203: 34.24,26.6 R22.2 33.65,26.01 33.63,26.01 33.12,25.5 28.89,25.5 U1.42
VDD_3V3  (via drill 0.3)  (19 unrouted)
  Top 0.254: U4.7 U4.6 U3.3 9.21,23.5 v9.14,23.57 | R19.2 R20.2 15.57,10.44 v15.54,10.46 | 17.34,20.96 16.53,20.96 C10.1 | 17.34,20.96 U1.64 | v12.7,23.06 13.03,22.74 U2.3 | LED1.A LED3.A LED2.A 22.34,34.28 J6.1 | U9.1 31.71,7.81 32.06,7.46 32.06,7.32 | U12.1 32.06,7.32 | 32.06,7.32 v32.51,7.32 | U1.19 27.53,13.66 27.53,12.7 27.43,12.6 v27.43,12.19 | U1.1 18.08,20.21 17.34,20.96 | v14.12,5.79 14.43,6.1 14.79,6.1 U8.8 | 24.58,1.81 C20.1 23.79,1.81 v23.57,2.03 23.07,2.53 U10.4 22.63,3.33 | 13.03,28.04 U2.6 | 13.03,28.04 13.03,28.23 v13.01,28.25 | U6.2 38.08,17.88 | U4.3 9.21,12.57 v9.14,12.5 | R9.1 16.25,26.02 v16.26,26.01 | U1.48 26.14,27.97 v26.42,28.25 26.67,28.5 26.67,28.91 26.87,29.11 C9.1 | 9.45,28.04 11.99,28.04 | 11.99,28.04 13.03,28.04 | 9.45,28.04 9.25,27.84 9.25,27.06 U3.6 | F1.1 8.39,29.81 9.25,28.96 9.25,28.25 9.45,28.04 | U1.32 32.47,18.94 v33.12,18.29 33.66,17.75 33.66,17.36 C8.1 | R16.2 11.68,28.35 11.99,28.04 | v16.46,22.05 16.46,21.24 C10.1 | U5.1 14.68,19.41 C2.1 15.23,19.87 C10.1 | 38.3,23.75 U6.4
  Top 0.381: 15.22,26.04 R9.1
  Top 0.406: v1.73,13.51 1.42,13.51 | v1.73,3.66 1.93,3.66 | F2B.1 4.78,12.09 v4.17,11.48
  Top 0.508: v34.75,14.22 C6.A | 38.08,17.88 v37.19,17.88 | v38.3,22.05 38.3,23.75
  Bottom 0.406: PAD2.1 v1.73,13.51 | PAD1.1 v1.73,3.66
  pour Route2 (isolate 0.305): 0.2,34.75 0.2,0.2 49.78,0.2 49.78,34.75
VDD_3V3_ANALOG  (via drill 0.3)
  Top 0.254: U1.13 22.32,14.7 21.59,13.97 | U7.5 37.34,9.56 C13.A | U12.15 U12.16 34.36,5.04 C21.1 34.95,5.63 v34.95,6.71 | C22.1 26.48,9.32 U11.18 24.77,9.32 24.49,9.04 24.49,8.64 24.8,8.32 U11.16 25.3,6.61 | U9.15 U9.14 30.53,11.22 | 30.53,11.22 C18.1 | v30.89,11.58 v30.89,11.57 30.53,11.22 | U10.3 22.73,0.81 25.81,0.81 26.19,1.19 26.19,1.71 C19.1 27.21,1.81 v27.23,1.83
  Top 0.381: 21.59,13.97 21.59,12.7 C15.1 21.56,12.19 25.3,12.19 26.7,10.79 C22.1 | C13.A 35.61,7.37 v34.95,6.71 | v25.4,6.5 25.3,6.61
  Route2 0.254: 30.79,6.2 30.89,6.1
  Route2 0.381: 30.89,6.1 32.82,6.1 33.43,6.71 v34.95,6.71 | v27.23,1.83 30.79,5.38 30.79,6.2 30.28,6.71 30.28,10.97 v30.89,11.58 25.81,6.5 v25.4,6.5
  Bottom 0.254: v25.4,6.5 23.94,5.04 X3.1
VDD_5V  (via drill 0.3, 0.3 pad 0.51)
  Top 0.254: 42.3,31.51 J2.2 arc90 43.33,31.5 | U6.3 40.66,15.87 L11.1 | R7.1 R2.2 17.27,30.5 v17.27,31.5 | 38.98,26.66 C7.1 39.38,26.67 | v13.82,12.39 13.68,12.54 U5.8 | v46.94,31.5 arc-90 46.95,31.51 arc-90 v46.94,31.5
  Top 0.381: 40.64,26.67 40.66,26.64 | v37.39,30.89 37.47,30.81 | D1.CATHODE 38.98,26.66
  Top 0.406: 39.38,26.67 40.64,26.67 | R1.2 19.91,31.19 19.61,31.5 v17.27,31.5 | F2A.1 4.91,10.7 v4.17,9.96
  Top 0.508: U6.3 40.66,26.64 40.66,29.87 42.3,31.51 | 37.47,30.81 D1.CATHODE | 46.95,31.51 J2.1 | 43.33,31.5 v44.91,31.5 v46.94,31.5 | v10.36,31.29 10.36,30.55 L1.1
  Route2 0.254: v13.82,12.39 13.82,13.01 10.82,16
  Route2 0.406: v10.36,31.29 10.36,31.09 7.72,28.45 7.72,19.1 10.82,16 10.36,15.54 10.36,15.24 5.08,9.96 v4.17,9.96
  Bottom 0.254: 48.62,31.5 arc90 J2.1 | v44.91,31.5 arc90 44.9,31.51
  Bottom 0.508: v10.36,31.29 10.57,31.5 v17.27,31.5 17.88,30.89 v37.39,30.89 | v46.94,31.5 48.62,31.5 | 44.9,31.51 J2.2

## Text on the board
tPlace: (c) 2011 mjs
bPlace: PX2 v1.0 | 5V | JTAG | 3.3V | SCL | SDA | UA2_TX | UA2_CTS | UA2_RTS | BOOT0 | UA2_RX | UA1_TX | GND | UA1_RX | PPM | GPIO1 | GPIO2 | 3V3 | ADC | GND | GND | SENSOR I2C | GPS | 3V3
tDocu: 3.3V | 5.0V